# Altium PCB telem_gsm.PcbDoc
Units mil, origin at the board's own origin, x right, y up, seen from the top; angles counter-clockwise.
Board outline 1978.53 x 3159.64 mil, 2 copper layers (Top Layer, Bottom Layer); 10 components, 19 nets, 78 pads, 123 vias.
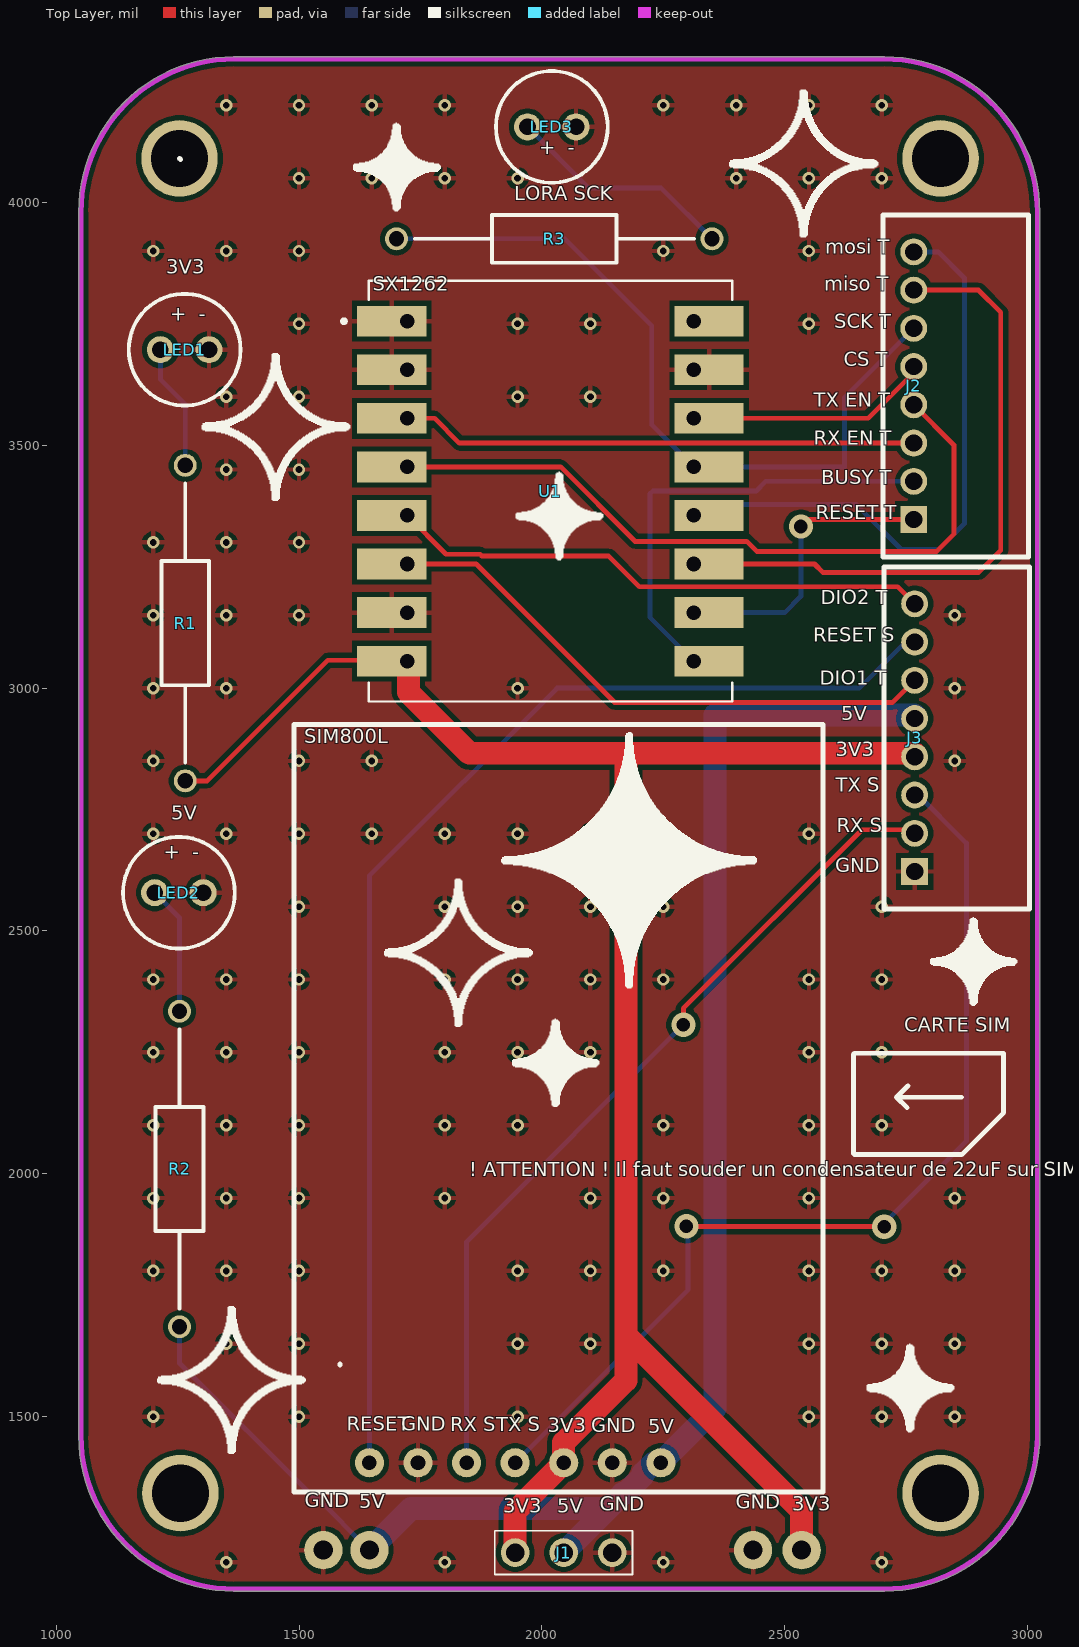
[diagram p0: Top Layer view]
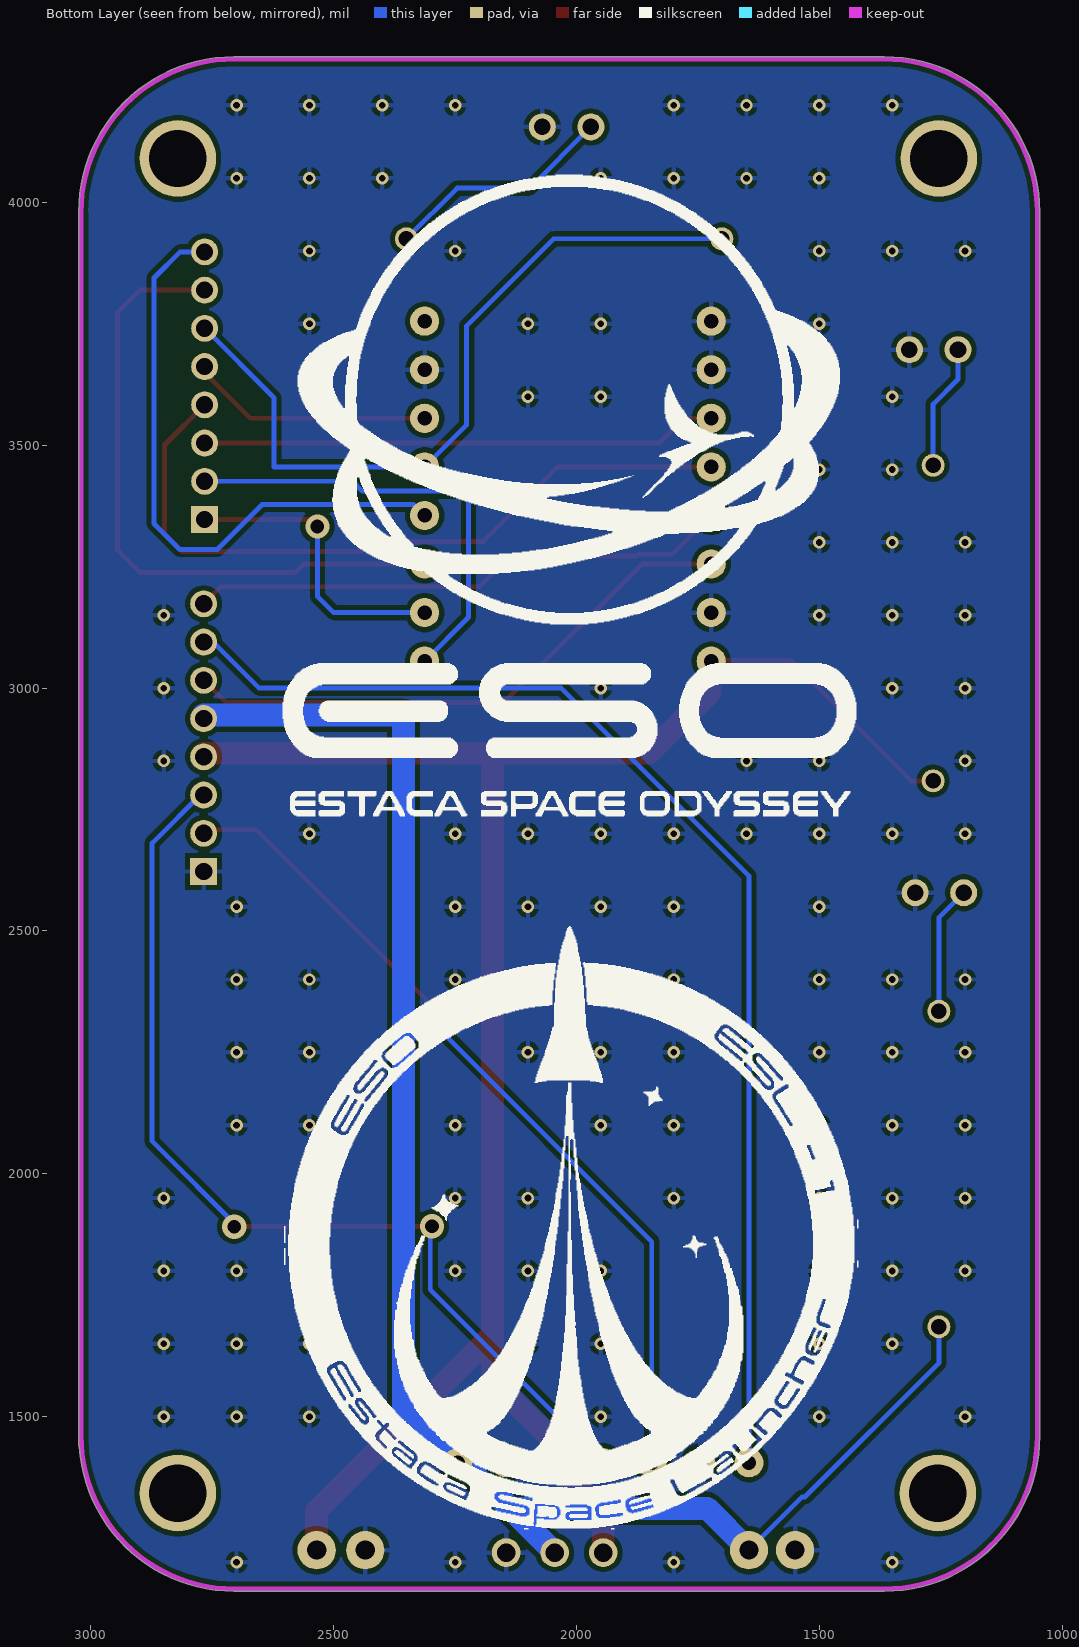
[diagram p1: Bottom Layer view, seen from below]
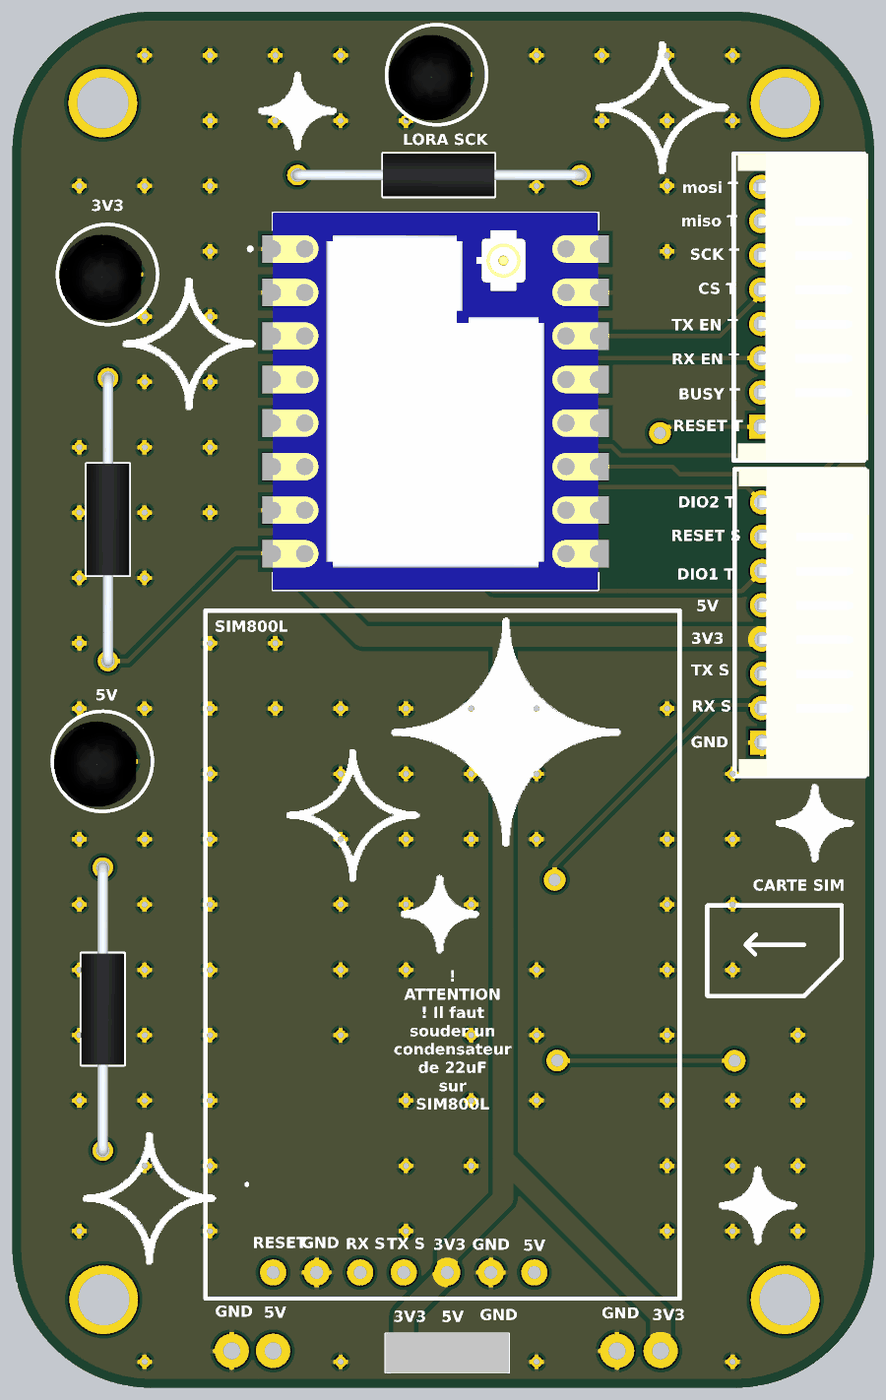
[diagram p2: 3D render of the assembled board from above, using the file's embedded part models]

## Layer stack, top to bottom
Top Solder: solder mask 0.4, Solder Resist, Dk 3.5
Top Layer: signal copper 1.4
Dielectric 1: dielectric 12.6, FR-4, Dk 4.8
Bottom Layer: signal copper 1.4
Bottom Solder: solder mask 0.4, Solder Resist, Dk 3.5

## Board outline
1366.42,1140.38 cw(c1366.42,1460.35) 1046.44,1460.35 1046.44,3980.04 cw(c1366.42,3980.04) 1366.42,4300.02 2705,4300.02 cw(c2705,3980.04) 3024.98,3980.04 3024.98,1440.67 3024.19,1437.98 cw(c2705,1460.35) 2705,1140.38

## Design rules (kind name [scope] priority, off if disabled: settings)
Clearance [All] p1: gap=10 ignorepadtopadclearanceinfootprint=FALSE except(0: Arc-Hole Track-Hole SMDPad-Hole THPad-Hole Via-Hole Fill-Hole Poly-Hole Region-Hole Text-Hole)
PolygonConnect [All] p1: connectstyle=Relief reliefconductorwidth=10 reliefentries=4 polygonreliefangle="90 Angle" airgapwidth=10
RoutingVias [All] p1: holewidth=19.68 width=31.5 viastyle="Through Hole" minholewidth=7.87 minwidth=19.68 maxholewidth=31.5 maxwidth=50
SolderMaskExpansion [All] p1: expansion=4 istentingtop=FALSE
Width [All] p1: maxlimit=47.24 minlimit=10 preferedwidth=10 minimp=50.000000 maximp=50.000000 favimp=50.000000
30 further rules are at their usual default settings.

## Components (designator, comment, footprint, x,y, rotation, side; value= is the part's Value field where it differs from the comment)
J1 "87224-3" 872243 2145,1220 r180 top
J2 "S8B-PH-K-S(LF)(SN)" DW08R 2765.75,3622.05 r90 top
J3 "S8B-PH-K-S(LF)(SN)" DW08R 2767.72,2897.31 r90 top
LED1 "HLMP-4740" HLMP4740 1214.57,3696.85 r90 top
LED2 "HLMP-4740" HLMP4740 1202.76,2578.74 r90 top
LED3 "HLMP-4740" HLMP4740 1970.47,4155.51 r90 top
R1 "MRS25000C1001FC100" RESAD1650W60L650D250 1265.75,3458.66 r270 top
R2 "MRS25000C1001FC100" RESAD1650W60L650D250 1253.94,2334.65 r270 top
R3 "MRS25000C1001FC100" RESAD1650W60L650D250 2350.39,3925.11 r180 top
U1 "CORE1262-868M" XCVR_CORE1262-868M 2017.72,3405.51 r0 top locked

## Footprints (in the part's own frame and the unit in brackets; to place one, negate y for a bottom-side part, rotate by r counter-clockwise, add the part's x,y. Pads: shape width x height; smd on the part's side, far side on the other; paste and mask are expansions set on the pad)
872243 [mil]
  round 59.09 hole 38: 1(0,0) 2(100,0) 3(200,0)
  silkscreen extent -42,-45 242,45, body extent -42,-46 242,46, height 409
DW08R [mm]
  rect 1.408x1.408 / inner round 1.408 / far side rect 1.408x1.408 hole 0.9: 1(-6.985,0)
  round 1.408 hole 0.9: 2(-4.985,0) 3(-2.985,0) 4(-0.985,0) 5(1.015,0) 6(3.015,0) 7(5.015,0) 8(7.015,0)
  silkscreen extent -8.95,-6 8.95,1.6, body extent -8.95,-6.25 8.95,1.35, height 4.8
HLMP4740 [mm]
  round 1.414 hole 0.87: 1(0,0) 2(0,-2.54)
  silkscreen extent -2.92,-4.19 2.92,1.65, body extent -2.99,-3.26 2.66,1.89, height 7.93
RESAD1650W60L650D250 [mm]
  round 1.2 hole 0.8: 1(0,0) 2(16.5,0)
  silkscreen extent 0.95,-1.25 15.55,1.25, body extent -0.3,-1.25 16.8,1.25, height 2.49
XCVR_CORE1262-868M [mil]
  rect 142.13x63.39 smd mask+1.97: 1(-326.77,350) 2(-326.77,250) 3(-326.77,150) 4(-326.77,50) 5(-326.77,-50) 6(-326.77,-150) 7(-326.77,-250) 8(-326.77,-350) 9(326.77,-350) 10(326.77,-250) 11(326.77,-150) 12(326.77,-50) 13(326.77,50) 14(326.77,150) 15(326.77,250) 16(326.77,350)
  round 60 hole 30: 29(-295,-350) 30(-295,-250) 31(-295,-150) 32(-295,-50) 33(-295,50) 34(-295,150) 35(-295,250) 36(-295,350) 45(295,-350) 46(295,-250) 47(295,-150) 48(295,-50) 49(295,50) 50(295,150) 51(295,250) 52(295,350)
  silkscreen extent -429,-433 374,433, body extent -374,-433 374,433, height 129

## Part data
J1: "Connector", Manufacturer_Name="TE Connectivity", Mouser Part Number=571-872243, Arrow Part Number=87224-3, Arrow Price/Stock=https://www.arrow.com/en/products/87224-3/te-connectivity?region=nac, Datasheet Link=https://datasheet.datasheetarchive.com/originals/distributors/Datasheets_SAMA/3b9b08c08f06dc562fe3ba32b60fa864.pdf, Height=10.3632mm, Manufacturer_Part_Number=87224-3, Mouser Price/Stock=https://www.mouser.co.uk/ProductDetail/TE-Connectivity/87224-3?qs=VKrXD49J9ErediZOfWku7Q%3D%3D
J2 J3: "ç©´ã‚’é€šã‚‹ã‚³ãƒã‚¯ã‚¿ãƒ˜ãƒƒãƒ€ãƒ¼ã€å³è§’åº", Package="NON STANDARD-8 J.S.T.", Availability="In Stock", Check_prices=https://www.snapeda.com/parts/S8B-PH-K-S%20(LF)(SN)/JST+Sales+America+Inc./view-part/?ref=eda, MF="JST Sales", MP="S8B-PH-K-S (LF)(SN)", Price=None, SnapEDA_Link=https://www.snapeda.com/parts/S8B-PH-K-S%20(LF)(SN)/JST+Sales+America+Inc./view-part/?ref=snap
LED1 LED2 LED3: "LED", Manufacturer_Name="Avago Technologies", Mouser Part Number=630-HLMP-4740, Datasheet Link=https://docs.broadcom.com/docs/AV02-1557EN, Height=9.19mm, Manufacturer_Part_Number=HLMP-4740, Mouser Price/Stock=https://www.mouser.co.uk/ProductDetail/Broadcom-Avago/HLMP-4740?qs=jT9z6tsiFNlbkh2eYMYS%2Fw%3D%3D
R1 R2 R3: "Resistor", Manufacturer_Name=Vishay, Mouser Part Number=594-MRS25000C1001FC1, Arrow Part Number=MRS25000C1001FC100, Arrow Price/Stock=https://www.arrow.com/en/products/mrs25000c1001fc100/vishay, Datasheet Link=http://www.vishay.com/docs/28724/mrs16m25.pdf, Manufacturer_Part_Number=MRS25000C1001FC100, Mouser Price/Stock=https://www.mouser.co.uk/ProductDetail/Vishay-BC-Components/MRS25000C1001FC100?qs=H30XFsNYD%2FEk7X0%2FV%252BraxQ%3D%3D
U1: "Lora core module", Package=Package, Availability="Not in stock", Check_prices=https://www.snapeda.com/parts/Core1262-868M/Waveshare+Electronics/view-part/?ref=eda, MF="Waveshare Electronics", MP=Core1262-868M, Price=None, SnapEDA_Link=https://www.snapeda.com/parts/Core1262-868M/Waveshare+Electronics/view-part/?ref=snap

## Free pads (board coordinates)
  round 60 hole 30: 34(1645,1405) 35(1745,1405) 36(1845,1405) 37(1945,1405) 38(2045,1405) 39(2145,1405) 40(2245,1405)
  round 78.74 hole 39.37: 42(2435,1225) 43(1645,1225) 44(2535,1225) 45(1550,1225)
  round 157.48 hole 118.11: 46(1255.91,1342.52) 47(2820.87,1342.52) 48(2820.87,4090.55) 49(1253.94,4090.55)

## Via types
v1: diameter 25.59, hole 13.78, Top Layer to Bottom Layer, 119 vias
v2: diameter 50, hole 28, Top Layer to Bottom Layer, 4 vias

## Nets (pads, with @x,y where several pads share a name; then routed paths per layer and width w, separated by ;. In a path a pad name is that pad's centre, name@x,y a point inside that pad or via, vN(x,y) a via of type N, cw(c..) or ccw(c..) an arc to the next point about the centre after c; other vN are vias at no path point)
3V3: J1.3 J3.4 pad.38 pad.44 R1.2 U1.8 U1.29 | length 4055.1
  Top Layer w10: R1.2 1311.02,2809.06 1559.19,3057.22 1693.23,3057.22 U1.29@1725,3057.22
  Top Layer w47.24: U1.29@1725,3057.22 1725,2991.54 1850.72,2865.82 2173.23,2865.82 ; J1.3 1945,1305 pad.38 2045,1446.57 2173.23,1574.8 2173.23,1667.32 ; pad.44 2535,1305.55 2173.23,1667.32 ; J3.4@2767.72,2865.82 2173.23,2865.82 ; 2173.23,1667.32 2173.23,2865.82
5V: J1.2 J3.5 pad.40 pad.43 R2.2 | length 3428.7
  Bottom Layer w10: R2.2 1253.94,1610.24 1529.53,1334.65 1535.35,1334.65 pad.43
  Bottom Layer w47.24: pad.43 1731.02,1311.02 2136.02,1311.02 ; J1.2 2166.38,1341.38 2171.35,1341.38 2208.62,1378.65 2208.62,1383.62 2230,1405 pad.40 2356.3,1516.3 2356.3,2944.56 J3.5@2767.72,2944.56
"busy telem": J2.2 U1.9 U1.45 | length 935.6
  Bottom Layer w10: U1.45 2222.44,3145.79 2222.44,3399.61 2228.35,3405.51 2440.94,3405.51 2461.22,3425.79 J2.2
"CS TELEM": J2.5 U1.14 U1.50 | length 504.4
  Top Layer w10: U1.50 U1.14 2671.65,3555.51 2765.75,3649.61 J2.5
"DIO1 TELEM": J3.6 U1.6 U1.31 | length 1181.9
  Top Layer w10: U1.31 1864.57,3255.51 2149.61,2970.47 2722.18,2970.47 J3.6
"DIO2 TELEM": J3.8 U1.5 U1.32 | length 1120.4
  Top Layer w10: U1.32 1802.72,3275.51 1872.85,3275.51 1876.71,3271.65 2137.8,3271.65 2200.63,3208.82 2267.21,3208.82 2732.39,3208.82 J3.8
GND: J1.1 J3.1 LED1.2 LED2.2 LED3.2 pad.35 pad.39 pad.42 pad.45 U1.1 U1.2 U1.7 U1.15 U1.30 U1.35 U1.36 U1.51
  other v1: 1350,1200 1800,1200 2250,1200 2700,1200 1200,1500 1500,1500 1950,1500 2550,1500 2700,1500 2850,1500 1350,1650 1500,1650 1950,1650 2100,1650 2550,1650 2700,1650 2850,1650 1200,1800 1350,1800 1500,1800 1950,1800 2100,1800 2250,1800 2550,1800 2700,1800 2850,1800 1200,1950 1350,1950 1500,1950 1800,1950 2100,1950 2250,1950 2550,1950 2850,1950 1200,2100 1350,2100 1500,2100 1800,2100 1950,2100 2250,2100 2550,2100 2700,2100 1200,2250 1350,2250 1500,2250 1800,2250 1950,2250 2100,2250 2550,2250 2700,2250 1200,2400 1350,2400 1500,2400 1800,2400 1950,2400 2100,2400 2250,2400 2550,2400 2700,2400 1500,2550 1800,2550 1950,2550 2100,2550 2250,2550 2700,2550 1200,2700 1350,2700 1500,2700 1650,2700 1800,2700 1950,2700 2100,2700 2250,2700 2550,2700 1200,2850 1500,2850 1650,2850 2850,2850 1200,3000 1350,3000 1950,3000 2850,3000 1200,3150 1350,3150 1500,3150 2850,3150 1200,3300 1350,3300 1500,3300 1350,3450 1500,3450 1350,3600 1500,3600 1950,3600 2100,3600 1500,3750 1950,3750 2100,3750 2550,3750 1200,3900 1350,3900 1500,3900 2250,3900 2550,3900 1500,4050 1650,4050 1800,4050 1950,4050 2400,4050 2550,4050 2700,4050 1350,4200 1500,4200 1650,4200 1800,4200 2250,4200 2400,4200 2550,4200 2700,4200
"MISO TELEM": J2.7 U1.11 U1.47 | length 1346.4
  Top Layer w10: U1.47 U1.11 2561.42,3255.51 2578.74,3238.19 2899.61,3238.19 2944.88,3283.46 2944.88,3773.62 2899.02,3819.49 J2.7
"MOSI TELEM": J2.8 U1.12 U1.48 | length 1259.5
  Bottom Layer w10: U1.48 2335.16,3377.95 2647.64,3377.95 2740.16,3285.43 2816.93,3285.43 2870.08,3338.58 2870.08,3844.49 2816.34,3898.23 J2.8
NetLED1_1: LED1.1 R1.1 | length 259.4
  Bottom Layer w10: LED1.1 1214.57,3635.83 1265.75,3584.65 R1.1
NetLED2_1: LED2.1 R2.1 | length 265.3
  Bottom Layer w10: LED2.1 1253.94,2527.56 R2.1
NetLED3_1: LED3.1 R3.1 | length 475.4
  Bottom Layer w10: LED3.1 2096.46,4029.53 2245.97,4029.53 R3.1
"RESET SIM": J3.7 pad.34 | length 2533.6
  Bottom Layer w10: pad.34 1645,2613.5 2031.5,3000 2308.58,3000 2653.54,3000 2755.58,3102.04 J3.7@2767.72,3102.04
reset_telem: J2.1 U1.10 U1.46 | length 616.5
  Top Layer w10: v2(2533.46,3332.68) 2547.83,3347.05 J2.1
  Bottom Layer w10: U1.46 2500,3155.51 2533.46,3188.98 v2(2533.46,3332.68)
"RX EN": J2.3 U1.3 U1.34 | length 1064.1
  Top Layer w10: U1.34 1779.13,3555.51 1830.12,3504.53 J2.3
RXSIM: J3.2 pad.36 | length 1749.2
  Top Layer w10: v2(2291.51,2306.57) 2291.51,2340.72 2659.12,2708.34 J3.2@2767.72,2708.34
  Bottom Layer w10: pad.36 1845,1860.05 v2(2291.51,2306.57)
"SCK TELEM": J2.6 R3.2 U1.13 U1.49 | length 1580.6
  Bottom Layer w10: R3.2 2047.33,3925.11 2226.38,3746.06 2226.38,3541.85 U1.49 2622.83,3455.51 2622.83,3597.83 J2.6
"TX EN": J2.4 U1.4 U1.33 | length 1513
  Top Layer w10: U1.33 2038.58,3455.51 2191.89,3302.2 2267.21,3302.2 2421.76,3302.2 2442.47,3281.5 2812.99,3281.5 2848.43,3316.93 2848.43,3500.59 J2.4
TXSIM: J3.3 pad.37 | length 2063.5
  Top Layer w10: v2(2297.68,1891.73) 2298.2,1891.21 v2(2704.9,1891.21)
  Bottom Layer w10: pad.37 2301.18,1761.18 2301.18,1888.23 v2(2297.68,1891.73) ; v2@2692.91,1885.83 2874.02,2066.93 2874.02,2680.78 J3.3@2767.72,2787.08
pads on no net: U1.16 U1.52

## Polygon pours and split planes (outlines as drawn)
GND on Top Layer "GND_L01_P000" (solid, remove dead copper, pour order 0): 1366.42,1140.38 cw(c1366.42,1460.35) 1046.44,1460.35 1046.44,3980.04 cw(c1366.42,3980.04) 1366.42,4300.02 2705,4300.02 cw(c2705,3980.04) 3024.98,3980.04 3024.98,1440.67 3024.19,1437.98 cw(c2705,1460.35) 2705,1140.38
GND on Bottom Layer "GND_L02_P001" (solid, remove dead copper, pour order 1): 1366.42,1140.38 cw(c1366.42,1460.35) 1046.44,1460.35 1046.44,3980.04 cw(c1366.42,3980.04) 1366.42,4300.02 2705,4300.02 cw(c2705,3980.04) 3024.98,3980.04 3024.98,1440.67 3024.19,1437.98 cw(c2705,1460.35) 2705,1140.38

## Keep-outs
Keep-Out Layer:
  lines w10: 1051.46,1676.89 1051.46,3980.04 cw(c1366.42,3980.04) 1366.42,4295 2705,4295 cw(c2705,3980.04) 3019.96,3980.04 3019.96,1440.67 ; 1051.46,3074.53 1051.46,3586.34 ; 1051.46,3192.64 1051.46,1460.35 ccw(c1366.42,1460.35) 1366.42,1145.39 2311.3,1145.39 ; 2291.61,1145.39 2705,1145.39 ccw(c2705,1460.35) 3019.96,1460.35

## Silkscreen, mask and mechanical layers (free items; w line width, h text height)
Top Overlay:
  drawing of 25 lines, arcs and shapes, not listed
  text "+  -" at 1995.08,4088.66 h50
  text "LORA SCK" at 1942.75,3994.56 h50
  text "mosi T" at 2583.63,3884.32 h50
  text "3V3" at 1226.78,3842.98 h50
  text "SX1262" at 1651.66,3807.55 h50
  text "miso T" at 2581.66,3807.55 h50
  text "+  -" at 1235.24,3746.14 h50
  text "SCK T" at 2601.99,3730.78 h50
  text "CS T" at 2621.21,3652.04 h50
  text "TX EN T" at 2560.07,3569.04 h50
  text "RX EN T" at 2559.98,3490.3 h50
  text "BUSY T" at 2575.55,3409.91 h50
  text "RESET T" at 2563.5,3337.08 h50
  text "DIO2 T" at 2574.16,3161.88 h50
  text "RESET S" at 2558.55,3085.11 h50
  text "DIO1 T" at 2572.19,2996.53 h50
  text "5V" at 2616.52,2923.69 h50
  text "SIM800L" at 1510.7,2876.45 h50
  text "3V3" at 2604.73,2848.89 h50
  text "TX S" at 2604.84,2776.05 h50
  text "5V" at 1236.6,2718.97 h50
  text "RX S" at 2606.71,2693.38 h50
  text "+  -" at 1221.46,2637.87 h50
  text "GND" at 2603.83,2610.7 h50
  text "CARTE SIM" at 2746.41,2281.96 h50
  text "! ATTENTION ! Il faut souder un condensateur de 22uF sur SIM800L" at 1850.41,1984.25 h50
  text "RESET" at 1597.93,1461.09 h50
  text "GND" at 1710.12,1461.09 h50
  text "RX S" at 1811.44,1459.12 h50
  text "TX S" at 1906.02,1459.12 h50
  text "3V3" at 2012.21,1457.15 h50
  text "GND" at 2101.86,1457.15 h50
  text "5V" at 2218.88,1455.19 h50
  text "GND" at 1511.61,1303.47 h50
  text "5V" at 1623.91,1301.24 h50
  text "GND" at 2399.1,1299.67 h50
  text "GND" at 2119.57,1295.74 h50
  text "3V3" at 2515.46,1295.69 h50
  text "3V3" at 1920.98,1291.75 h50
  text "5V" at 2031.39,1291.4 h50
Bottom Overlay:
  drawing of 46 lines, arcs and shapes, not listed